# Altium PCB SimpleNode33.PcbDoc
Units mil, origin at the board's own origin, x right, y up, seen from the top; angles counter-clockwise.
Board outline 1299.21 x 551.18 mil, 2 copper layers (Top Layer, Bottom Layer); 42 components, 42 nets, 167 pads, 33 vias.
Unrouted connection lines stored in the file: 2.
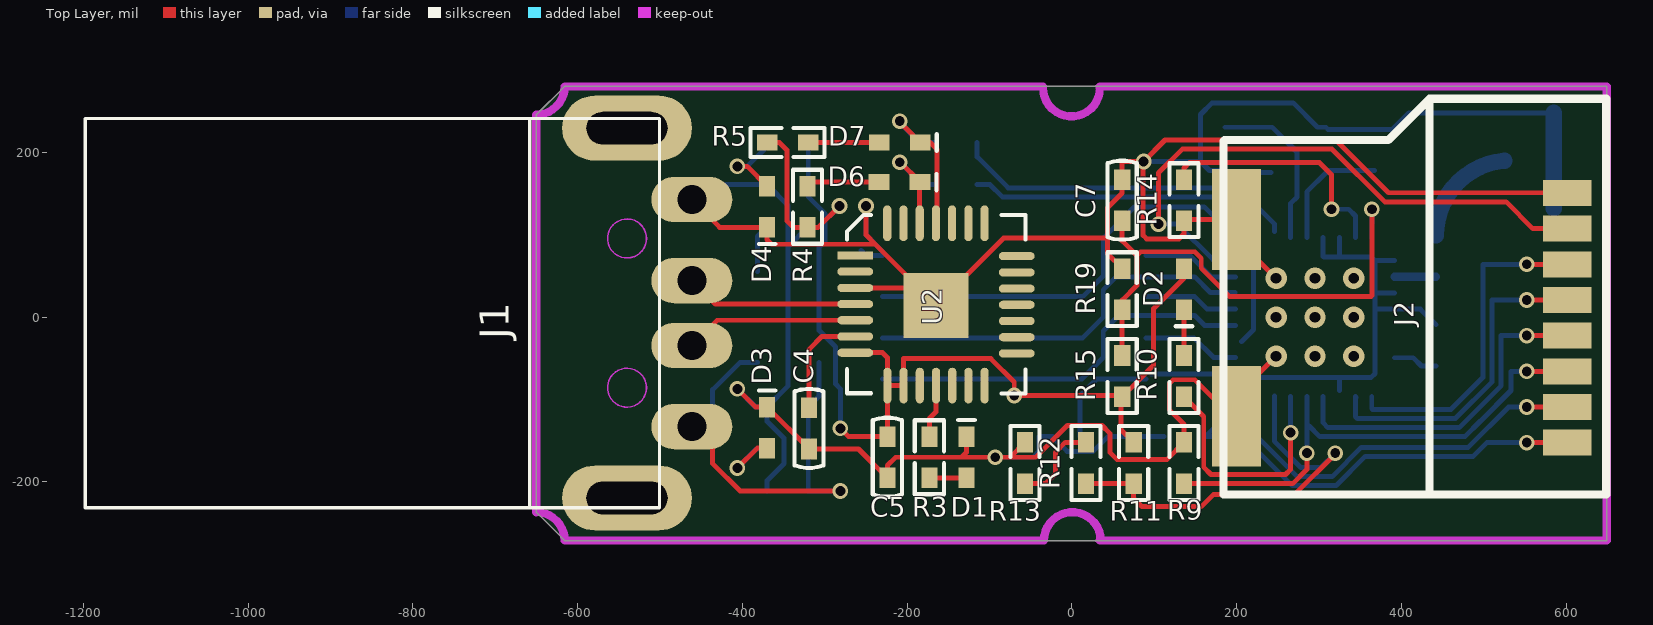
[diagram p0: Top Layer view]
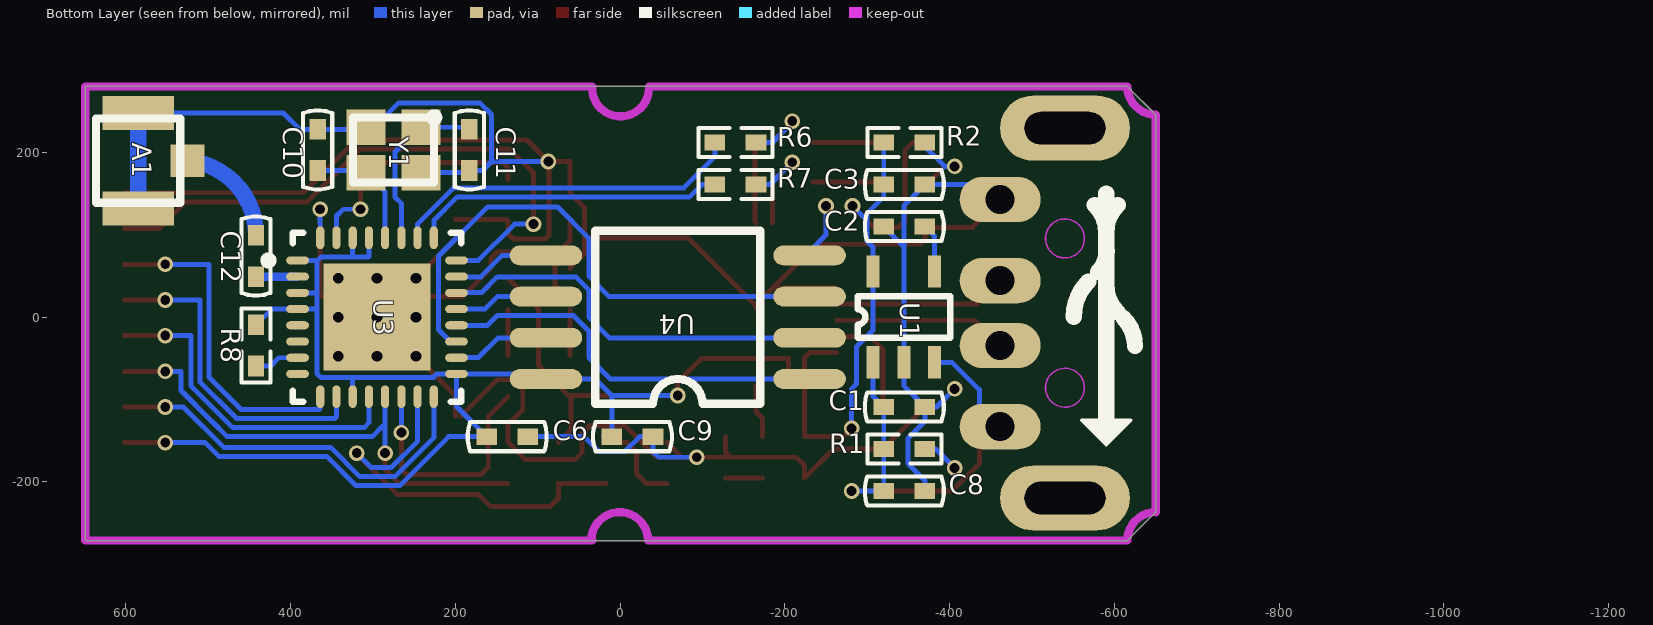
[diagram p1: Bottom Layer view, seen from below]

## Layer stack, top to bottom
Top Layer: signal copper 1.4
Dielectric: dielectric 12.6, FR-4, Dk 4.8
Bottom Layer: signal copper 1.4

## Board outline
649.08,280.12 33.92,280.12 -615.68,280.12 -650.13,245.67 -650.13,-236.61 -615.68,-271.06 -615.53,-271.06 649.08,-271.06 649.08,280.12

## Design rules (kind name [scope] priority, off if disabled: settings)
Clearance [All] p1: gap=5
DiffPairsRouting [All] p1: maxlimit=10 minlimit=10 mostfreqgap=10 maxuncoupledlength=500
MinimumSolderMaskSliver [All] p1 off: minsoldermaskwidth=10
PolygonConnect [All] p1: connectstyle=Relief reliefconductorwidth=10 reliefentries=4 polygonreliefangle="90 Angle"
RoutingVias [All] p1: holewidth=12 width=19 viastyle="Through Hole" minholewidth=12 minwidth=19 maxholewidth=28 maxwidth=50
SilkToSilkClearance [All] p1 off: silktosilkclearance=0
SilkscreenOverComponentPads [All] p1 off: minsilkscreentomaskgap=0
SolderMaskExpansion [All] p1: expansion=4
Width [All] p1: maxlimit=20 minlimit=6 preferedwidth=6
24 further rules are at their usual default settings.

## Classes and differential pairs
differential pair UD: +UD_P -UD_N

## Components (designator, comment, footprint, x,y, rotation, side; value= is the part's Value field where it differs from the comment)
A1 "50ohm" "IPEX-1 底座" 585,190 r180 bottom locked
C1 "105" C0402 -345,-109 r0 bottom
C2 "CAP" C0402 -345,110 r180 bottom
C3 "CAP" C0402 -345,161 r0 bottom
C4 "10V" C0402 -319,-135 r90 top
C5 "10V" C0402 -224,-170 r90 top
C6 "10V" C0402 137,-145 r0 bottom
C7 "10V" C0402 61,142 r270 top
C8 "CAP" C0402 -345,-211 r0 bottom
C9 "10V" C0402 -15,-145 r0 bottom
C10 "10V" C0402 367,203 r90 bottom locked
C11 "10V" C0402 183,203 r270 bottom locked
C12 "10V" C0402 442,74.21 r270 bottom locked
D1 "STA" LED0402 -128,-170 r90 top
D2 "STA" LED0402 136,34 r270 top
D3 "PW5V" LED0402 -370,-134 r90 top
D4 "PW3V3" LED0402 -370,134 r270 top
D6 "TXD" LED0402 -209.26,164 r0 top
D7 "RXD" LED0402 -209,212 r0 top
J1 "USB-A" "USB-A 公头" -540,5 r0 top
J2 "TFCard" "TFCard 卡座 简易" 184,265 r270 top
R1 "5%" R0402 -345,-160 r180 bottom
R2 "5%" R0402 -345,212 r0 bottom
R3 "5%" R0402 -173,-170 r90 top
R4 "5%" R0402 -321,134 r90 top
R5 "5%" R0402 -345,212 r180 top
R6 "5%" R0402 -140,212 r180 bottom
R7 "5%" R0402 -140,161 r0 bottom
R8 "1%" R0402 442,-34.21 r270 bottom
R9 "5%" R0402 136,-177 r270 top
R10 "5%" R0402 136,-71.46 r270 top
R11 "5%" R0402 75,-177 r90 top
R12 "5%" R0402 17,-177 r90 top
R13 "FLASH" R0402 -57,-177 r270 top
R14 "1%" R0402 136,142 r270 top
R15 "5%" R0402 61,-71.46 r270 top
R19 "RESET" R0402 61,34 r270 top
U1 "SPX3819M5-L-3-3" SOT25-5 -347,0.24 r90 bottom
U2 "CP2102" MLP28 -165,14 r0 top locked
U3 "ESP8266" QFN32L 295,0 r180 bottom locked
U4 "2M Flash" SOIC8 -230,-75 r0 bottom locked
Y1 "10ppm" XTAL-2520 275,203 r0 bottom locked

## Footprints (in the part's own frame and the unit in brackets; to place one, negate y for a bottom-side part, rotate by r counter-clockwise, add the part's x,y. Pads: shape width x height; smd on the part's side, far side on the other; paste and mask are expansions set on the pad)
C0402 [mm]
  rect 0.635x0.5 smd: 1(-0.635,0) 2(0.635,0)
  silkscreen extent -1.22,-0.45 1.22,0.45
"IPEX-1 底座" [mm]
  rect 1.05x1 smd: 1(1.525,0)
  rect 2.2x1.05 smd: 2(0,1.475) 3(0,-1.475)
  silkscreen extent -1.3,-1.3 1.3,1.3
LED0402 [mm]
  rect 0.635x0.5 smd: 1(-0.632,0) 2(0.633,0)
  silkscreen extent 1.14,-0.25 1.14,0.25
MLP28 [mm]
  rect 1.1x0.25 smd: 1(-2.489,1.549)
  oval 1.1x0.25 smd: 2(-2.489,1.049) 3(-2.489,0.549) 4(-2.489,0.049) 5(-2.489,-0.451) 6(-2.489,-0.951) 7(-2.489,-1.451) 15(2.489,-1.473) 16(2.489,-0.973) 17(2.489,-0.473) 18(2.489,0.027) 19(2.489,0.527) 20(2.489,1.027) 21(2.489,1.527)
  rect 2x2 smd: 3(0,0)
  oval 0.25x1.1 smd: 8(-1.499,-2.464) 9(-0.999,-2.464) 10(-0.499,-2.464) 11(0.001,-2.464) 12(0.501,-2.464) 13(1.001,-2.464) 14(1.501,-2.464) 22(1.499,2.54) 23(0.999,2.54) 24(0.499,2.54) 25(-0.001,2.54) 26(-0.501,2.54) 27(-1.001,2.54) 28(-1.501,2.54)
  silkscreen extent -2.74,-2.71 2.76,2.79
QFN32L [mm]
  oval 0.7x0.25 smd: 1(-2.45,1.75) 2(-2.45,1.25) 3(-2.45,0.75) 4(-2.45,0.25) 5(-2.45,-0.25) 6(-2.45,-0.75) 7(-2.45,-1.25) 8(-2.45,-1.75) 17(2.45,-1.75) 18(2.45,-1.25) 19(2.45,-0.75) 20(2.45,-0.25) 21(2.45,0.25) 22(2.45,0.75) 23(2.45,1.25) 24(2.45,1.75)
  oval 0.25x0.7 smd: 9(-1.75,-2.45) 10(-1.25,-2.45) 11(-0.75,-2.45) 12(-0.25,-2.45) 13(0.25,-2.45) 14(0.75,-2.45) 15(1.25,-2.45) 16(1.75,-2.45) 25(1.75,2.45) 26(1.25,2.45) 27(0.75,2.45) 28(0.25,2.45) 29(-0.25,2.45) 30(-0.75,2.45) 31(-1.25,2.45) 32(-1.75,2.45)
  rect 3.3x3.3 smd: 33(0,0)
  silkscreen extent -3.48,-2.6 2.6,2.6, body extent -2.58,-2.58 2.58,2.58, height 0.8
R0402 [mm]
  rect 0.635x0.5 smd: 1(-0.635,0) 2(0.635,0)
  silkscreen extent -1.14,-0.45 1.14,0.45
SOIC8 [mil]
  oval 88x24 smd: 1(0,0) 2(0,-50) 3(0,-100) 4(0,-150) 5(320,-150) 6(320,-100) 7(320,-50) 8(320,0)
  silkscreen extent 60,-180 260,30, body extent -5,-181 325,31, height 91
SOT25-5 [mm]
  rect 1x0.4 smd: 1(-1.397,1.016) 2(-1.397,0.066) 3(-1.397,-0.884) 4(1.403,-0.884) 5(1.403,1.016)
  silkscreen extent -0.64,-1.36 0.64,1.49
"TFCard 卡座 简易" [mm]
  rect 0.8x1.5 smd: 1(10.6,10.6) 2(9.5,10.6) 3(8.4,10.6) 4(7.3,10.6) 5(6.2,10.6) 6(5.1,10.6) 7(4,10.6) 8(2.9,10.6)
  rect 3.1x1.5 smd: 9(3.72,0.4) 10(9.78,0.4)
  silkscreen extent 0,0 12.2,11.8
"USB-A 公头" [mm]
  oval 1.5x1.4 on Bottom Overlay: 1(-1.27,3.683)
  oval 2.5x1.4 hole 0.9: 1(2,-3.5) 2(2,-1) 3(2,1) 4(2,3.5)
  oval 4x2 hole 1 slot 2.5 at 0 deg: 4(0,-5.7) 4(0,5.7)
  Keep-Out Layer circle w0.05: c0,-2.3 r0.6
  Keep-Out Layer circle w0.05: c0,2.3 r0.6
  silkscreen extent -16.7,-6 1,6
XTAL-2520 [mm]
  rect 1.2x1.1 smd: 1(-0.85,-0.7) 2(0.85,-0.7) 3(0.85,0.7) 4(-0.85,0.7)
  silkscreen extent -1.38,-1.13 1.25,1

## Part data
J2: library part "TFCard 卡座 简易", "TFCard 卡座 简易"
U4: library part GD25Q16CSIG

## Via types
v1: diameter 19, hole 12, Top Layer to Bottom Layer, 24 vias
v2: diameter 25.98, hole 12.99, Top Layer to Bottom Layer, tented top, 9 vias

## Nets (pads, with @x,y where several pads share a name; then routed paths per layer and width w, separated by ;. In a path a pad name is that pad's centre, name@x,y a point inside that pad or via, vN(x,y) a via of type N, cw(c..) or ccw(c..) an arc to the next point about the centre after c; other vN are vias at no path point)
ADC: U3.6
GND: A1.2 A1.3 C1.1 C2.1 C3.1 C4.1 C5.1 C6.1 C7.1 C8.1 C9.1 C10.2 C11.2 D1.2 D3.2 D4.2 J1.4 J2.8 J2.9 J2.10 R9.1 R13.1 R14.2 R19.1 U1.2 U2.3 U3.33 U4.4 Y1.2 Y1.4 | length 4409.6
  Top Layer w6: J1.4@-461.26,142.8 -427.56,109.1 D4.2 -370,94 -364.5,88.5 -238.61,88.5 ; v1(-406,-87) -383.9,-109.1 D3.2 -369.9,-109.1 C4.1 -259,-160 C5.1 -224,-180 -214,-170 -134,-170 ; U2.3@-263,35.63 U2.3@-186.63,35.63 ; v1(-250,135) -250,99.89 -238.61,88.5 ; U2.3@-165,11.12 U2.3@-165,14 ; U2.3@-165,14.89 -238.61,88.5 ; U2.3@-165,16 U2.3@-165,14 ; D1.2 -128,-164 -134,-170 ; R13.1 -75,-170 ; 43.16,96 -83,96 U2.3@-165,14 ; R19.1@61,59.26 43.16,77.1 43.16,132.81 61,150.66 C7.1 61,189 86.5,189 86.5,99.27 90.77,95 130,95 136,101 R14.2 ; v1(87,189) 113,215 320.31,215 384.31,151 601.15,151 J2.8 ; R14.2@137.54,118.54 J2.9 ; J2.10@193.24,-120.04 149.16,-75.96 122.84,-75.96 118.16,-80.64 118.16,-112.27 136,-130.11 R9.1 115.5,-172.5 54.5,-172.5 46,-164 46,-141 36.5,-131.5 -5.5,-131.5 -44,-170 -75,-170 ; J2.10 199.75,-95.25 v2(247.76,-47.24) ; J2.9@199.75,95.25 v2(247.76,47.24) ; -134,-170 v1(-93,-170) -75,-170
  Bottom Layer w6: J1.4@-443.06,161 C3.1 -344.4,135.4 -344.4,85.6 ; v1(-406,-87) -384,-109 C1.1 ; C8.1 -370,-198.34 -349.5,-177.84 -349.5,-146.84 -370,-126.34 C1.1 ; C2.1 -344.4,85.6 ; U4.4@-256,81 -250,75 U4.4 ; v1(-250,135) -250,100 U4.4@-230,80 ; v1(-93,-170) -47,-170 -40,-163 C9.1 -23.66,-145 -5.81,-162.84 25.81,-162.84 43.66,-145 C6.1 ; v1@89,189 156,189 ; C11.2@183,187.41 C11.2 167,178 156,189 ; C11.2@185.56,175.44 Y1.4 ; Y1.2 298.12,230.56 268.47,260.21 170.21,260.21 156,246 156,189 ; Y1.2@311.02,228 C10.2 389,228 409.07,248.07 A1.2 ; C1.1 -344.4,-83.4 U1.2 -344.4,85.6
  Bottom Layer w20: A1.3 A1.2
  other v2: 295,-47.24 342.24,-47.24 247.76,0 295,0 342.24,0 295,47.24 342.24,47.24
GPIO0: R11.1 R12.1 U3.15 | length 500.5
  Top Layer w6: R12.1 R11.1 75,-220 85,-230 157,-230 172,-215 270.56,-215 v1@319.56,-166
  Bottom Layer w6: U3.15@245.79,-95.46 U3.15 245.79,-150.38 277.91,-182.5 302.06,-182.5 v1(319.56,-165)
GPIO2: R10.2 U3.14 | length 295.7
  Top Layer w6: R10.2 160,-120.46 160,-182.16 168.84,-191 259.23,-191 265.47,-184.76 v1(265.47,-140.06)
  Bottom Layer w6: v1(265.47,-140.06) U3.14
GPIO4: J2.2 U3.16 | length 478.6
  Top Layer w6: v1(552,-109.02) J2.2
  Bottom Layer w6: U3.16 226.1,-146.25 273.35,-193.5 315.81,-193.5 351.31,-158 481,-158 530,-109 v1@551,-109.02
GPIO5: J2.7 U3.24 | length 722.1
  Top Layer w6: v1(105,113) 105,175 134,204 315.75,204 379.75,140 527,140 559.48,107.52 J2.7
  Bottom Layer w6: v1(105,113) 128,113 172.1,68.9 U3.24
GPIO12: J2.5 U3.10 | length 399.3
  Top Layer w6: v1(552,20.91) J2.5
  Bottom Layer w6: U3.10@345,-97.24 U3.10 344.21,-120.79 346.43,-123 465.44,-123 510,-78.44 510,20.91 v1@550,20.91
GPIO13: J2.4 U3.12 | length 411.2
  Top Layer w6: v1(552,-22.4) J2.4
  Bottom Layer w6: U3.12 304.84,-128.16 310.69,-134 470,-134 521,-83 521,-22.4 v1@550.9,-22.4
GPIO14: J2.6 U3.9 | length 402.6
  Top Layer w6: v1(552,64.21) J2.6
  Bottom Layer w6: U3.9 363.9,-110.9 365,-112 460,-112 499,-73 499,64.21 v1@548.9,64.21
GPIO15: J2.3 R9.2 U3.13 | length 605.9
  Top Layer w6: R9.2 268,-202 285.16,-184.84 v1@285.16,-170.09 ; v1(552,-65.71) J2.3
  Bottom Layer w6: U3.13 285.16,-162.16 v1@288,-165 ; 288,-132 301,-145 476.89,-145 495.89,-126 496,-126 533,-89 533,-65.71 v1(552,-65.71)
  other v1: 285.16,-165
GPIO16: U3.8
NetA1_1: A1.1 C12.1 | length 135.1
  Bottom Layer w19.68: C12.1 cw(c532.68,99.65) A1.1
NetC2_2: C2.2 U1.4 | length 59.4
  Bottom Layer w6: U1.4 -381.8,98.2 C2.2
NetC4_2: C4.2 U2.6 | length 133.5
  Top Layer w6: C4.2 -319,-39 -303.43,-23.43 U2.6
NetC7_2: C7.2 R15.1 R19.2 U3.32 | length 623.2
  Top Layer w6: R15.1 R19.2 ; R19.2@61,20.66 78.84,38.5 78.84,74.81 ; C7.2 61,92.66 78.84,74.81 ; v1(364,131) 364,26 363,25 191.43,25 157,59.43 157,71.56 149.16,79.4 83.43,79.4 78.84,74.81
  Bottom Layer w6: U3.32 v1(364,131)
NetC10_1: C10.1 U3.28 Y1.3 | length 148.2
  Bottom Layer w6: U3.28 285.16,152.13 Y1.3 311.02,178 C10.1
NetC11_1: C11.1 U3.27 Y1.1 | length 207.2
  Bottom Layer w6: C11.1@185.56,230.56 Y1.1 243.01,230.56 273.16,200.41 273.16,145.79 265.47,138.1 U3.27
NetC12_2: C12.2 U3.2 | length 50.5
  Bottom Layer w10: U3.2 C12.2
NetD1_1: D1.1 R3.1 | length 44.9
  Top Layer w6: R3.1 D1.1@-128.1,-195
NetD2_2: D2.2 R10.1 | length 55.6
  Top Layer w6: R10.1 D2.2
NetD3_1: D3.1 R1.2 | length 91.5
  Top Layer w6: v1(-406,-183) -381.9,-158.9 D3.1
  Bottom Layer w6: v1(-406,-183) -383,-160 R1.2
NetD4_1: D4.1 R2.1 | length 91.9
  Top Layer w6: v1(-406,183) -394.1,183 D4.1
  Bottom Layer w6: v1(-406,183) -394,183 R2.1@-370,207
NetD6_1: D6.1 R4.2 | length 81.8
  Top Layer w6: R4.2@-316,164 D6.1
NetD7_1: D7.1 R5.1 | length 86.1
  Top Layer w6: R5.1 D7.1
NetR3_2: R3.2 U2.11 | length 65.3
  Top Layer w6: R3.2 -173,-123 -164.95,-114.95 U2.11
NetR8_2: R8.2 U3.7 | length 54.7
  Bottom Layer w6: U3.7 414.21,-49.21 424.21,-59.21 R8.2
NetR12_2: R12.2 R13.2 | length 109.9
  Top Layer w6: R13.2 -32,-202 -20,-190 -20,-164 -8,-152 R12.2
NetR14_1: R14.1 U3.31 | length 302.7
  Top Layer w6: R14.1 136,181 142.57,187.57 300.43,187.57 315,173 v1(315,131)
  Bottom Layer w6: v1(315,131) 336,131 344.21,122.79 U3.31
RXD: D7.2 R6.2 U2.25 | length 189.8
  Top Layer w6: v1@-208.1,236 D7.2 ; D7.2@-172,212 -163.86,203.86 -163.86,115.2 U2.25
  Bottom Layer w6: v1@-209,236 -185,212 R6.2
  other v1: -209,238
SD_CLK: U3.21 U4.6 | length 114.8
  Bottom Layer w6: U4.6 149,25 164.16,9.84 U3.21
SD_CMD: U3.20 U4.1 | length 484.2
  Bottom Layer w6: U4.1 12,-75 38,-49 38,-16.72 56.72,2 149,2 161,-10 U3.20@198.39,-10
SD_DATA_0: U3.22 U4.2 | length 486.1
  Bottom Layer w6: U4.2 13,-25 38,0 38,33.28 53.72,49 149,49 168,30 U3.22@198.07,30
SD_DATA_1: U3.23 U4.5 | length 119.1
  Bottom Layer w6: U4.5 143,75 169,49 U3.23@198.33,49
SD_DATA_2: U3.18 U4.7 | length 118.3
  Bottom Layer w6: U4.7 148,-25 172,-49 U3.18@198.33,-49
SD_DATA_3: U3.19 U4.3 | length 656.9
  Bottom Layer w6: U4.3 13,25 38,50 38,96 76,134 160.57,134 220.32,74.25 220.32,-15.19 U3.19@205.99,-29.53
TXD: D6.2 R7.1 U2.26 | length 139.3
  Top Layer w6: v1@-208.36,188 D6.2 -184.74,163.62 U2.26
  Bottom Layer w6: v1(-209,188) -182,161 R7.1
U0RXD: R7.2 U3.25 | length 380.1
  Bottom Layer w6: R7.2 -99.56,161 -84.56,146 197.44,146 226.1,117.34 U3.25
U0TXD: R6.1 U3.26 | length 421.2
  Bottom Layer w6: R6.1 -115,194.66 -77.34,157 202,157 245.79,113.21 U3.26@245.79,103.9
UD_N: J1.2 U2.5 | length 210.9
  Top Layer w6: J1.2 -430.63,-3.74 U2.5
UD_P: J1.3 U2.4 | length 210
  Top Layer w6: J1.3 -432.83,15.94 U2.4
VCC3V3: C3.2 C5.2 C6.2 C9.2 D2.1 J2.1 R2.2 R4.1 R5.2 R8.1 R11.2 R15.2 U1.5 U2.7 U2.8 U2.9 U3.1 U3.3 U3.4 U3.11 U3.17 U3.29 U3.30 U4.8 | length 2844.1
  Top Layer w6: R5.2 -355,212 -346,203 -346,117 -338,109 R4.1 -308,109 v1(-282,135) ; v1(-281,-135) -271,-145 C5.2 U2.8 ; U2.7 -229.89,-43.11 -224,-49 U2.8 ; R15.2 99,-58.46 99,10.44 D2.1@136,47.44 ; R11.2 59.54,-136.54 59.54,-95 v1(-70,-95) -70,-78.63 -98.32,-50.32 -204.32,-50.32 U2.9 U2.8 ; v1(552,-152.32) J2.1
  Bottom Layer w6: R2.2 C3.2 -320,146 -299.5,125.5 -299.5,117.5 ; v1(-282,135) -299.5,117.5 ; v1(-281,-135) -281,-87 -287,-81 -287,-35.89 -307,-15.89 U1.5 -307,85 -299.5,92.5 -299.5,117.5 ; v1(-70,-95) 10,-95 30,-75 U4.8 ; 10,-97.44 C9.2 C9.2@20,-145 ; U4.8@96.1,-68.9 U3.17 222.66,-68.9 226.73,-72.96 324.53,-72.96 ; U3.17@198.54,-67 198.54,-108.46 C6.2 208,-145 267.5,-204.5 320.5,-204.5 356,-169 487,-169 503.68,-152.32 v1(552,-152.32) ; U3.29 304.84,73.8 305.69,72.96 363.27,72.96 367.34,68.9 ; U3.11@324.53,-89.01 324.53,-72.96 ; 324.53,73.43 U3.30 ; 368.43,29.53 U3.3 ; U3.1 367.34,68.9 ; R8.1 422.94,9.84 U3.4 368.16,9.84 367.96,10.04 ; v1@552,-152 v1@552,-148 ; 324.53,-72.96 363.27,-72.96 367.96,-68.27 367.96,10.04 ; 367.34,68.9 367.96,68.27 367.96,10.04
VCC5V: C1.2 C8.2 J1.1@-461.26,-132.8 R1.1 U1.1 U1.3 | length 597.3
  Top Layer w6: J1.1@-461.26,-132.8 -436,-158.06 -436,-177.75 -402.75,-211 v1(-281,-211)
  Bottom Layer w6: J1.1@-461.26,-153.4 J1.1@-461.26,-132.8 ; J1.1@-441,-153.06 J1.1@-461.26,-132.8 ; U1.3 -402.76,-54.76 -436,-88 -436,-107.54 J1.1@-461.26,-132.8 ; U1.1 -307,-96 C1.2 R1.1 C8.2 v1(-281,-211)
pads on no net: J1.1@-590,150 U2.1 U2.2 U2.10 U2.12 U2.13 U2.14 U2.15 U2.16 U2.17 U2.18 U2.19 U2.20 U2.21 U2.22 U2.23 U2.24 U2.27 U2.28 U3.5

## Keep-outs
Keep-Out Layer:
  lines w10: -615.68,-271.06 ccw(c-650.13,-271.06) -650.13,-236.61 -650.13,245.67 ccw(c-650.13,280.12) -615.68,280.12 -34.98,280.12 ; -615.53,-271.06 -34.98,-271.06 ; -34.98,278.12 ccw(c-0.53,278.12) 33.92,278.12 ; -33.98,-271.06 cw(c0.47,-271.06) 34.92,-271.06 ; 33.92,-271.06 649.08,-271.06 649.08,280.12 33.92,280.12